# Altium PCB ui_layout-v1.2.PcbDoc
Units mil, origin at the board's own origin, x right, y up, seen from the top; angles counter-clockwise.
Board outline 3110.07 x 2131 mil, 4 copper layers (L1_Signal, L2_GND, L3_PWR, L4_Signal), stack 61.811 mil thick; 61 components, 69 nets, 248 pads, 77 vias.
Unrouted connection lines stored in the file: 65.
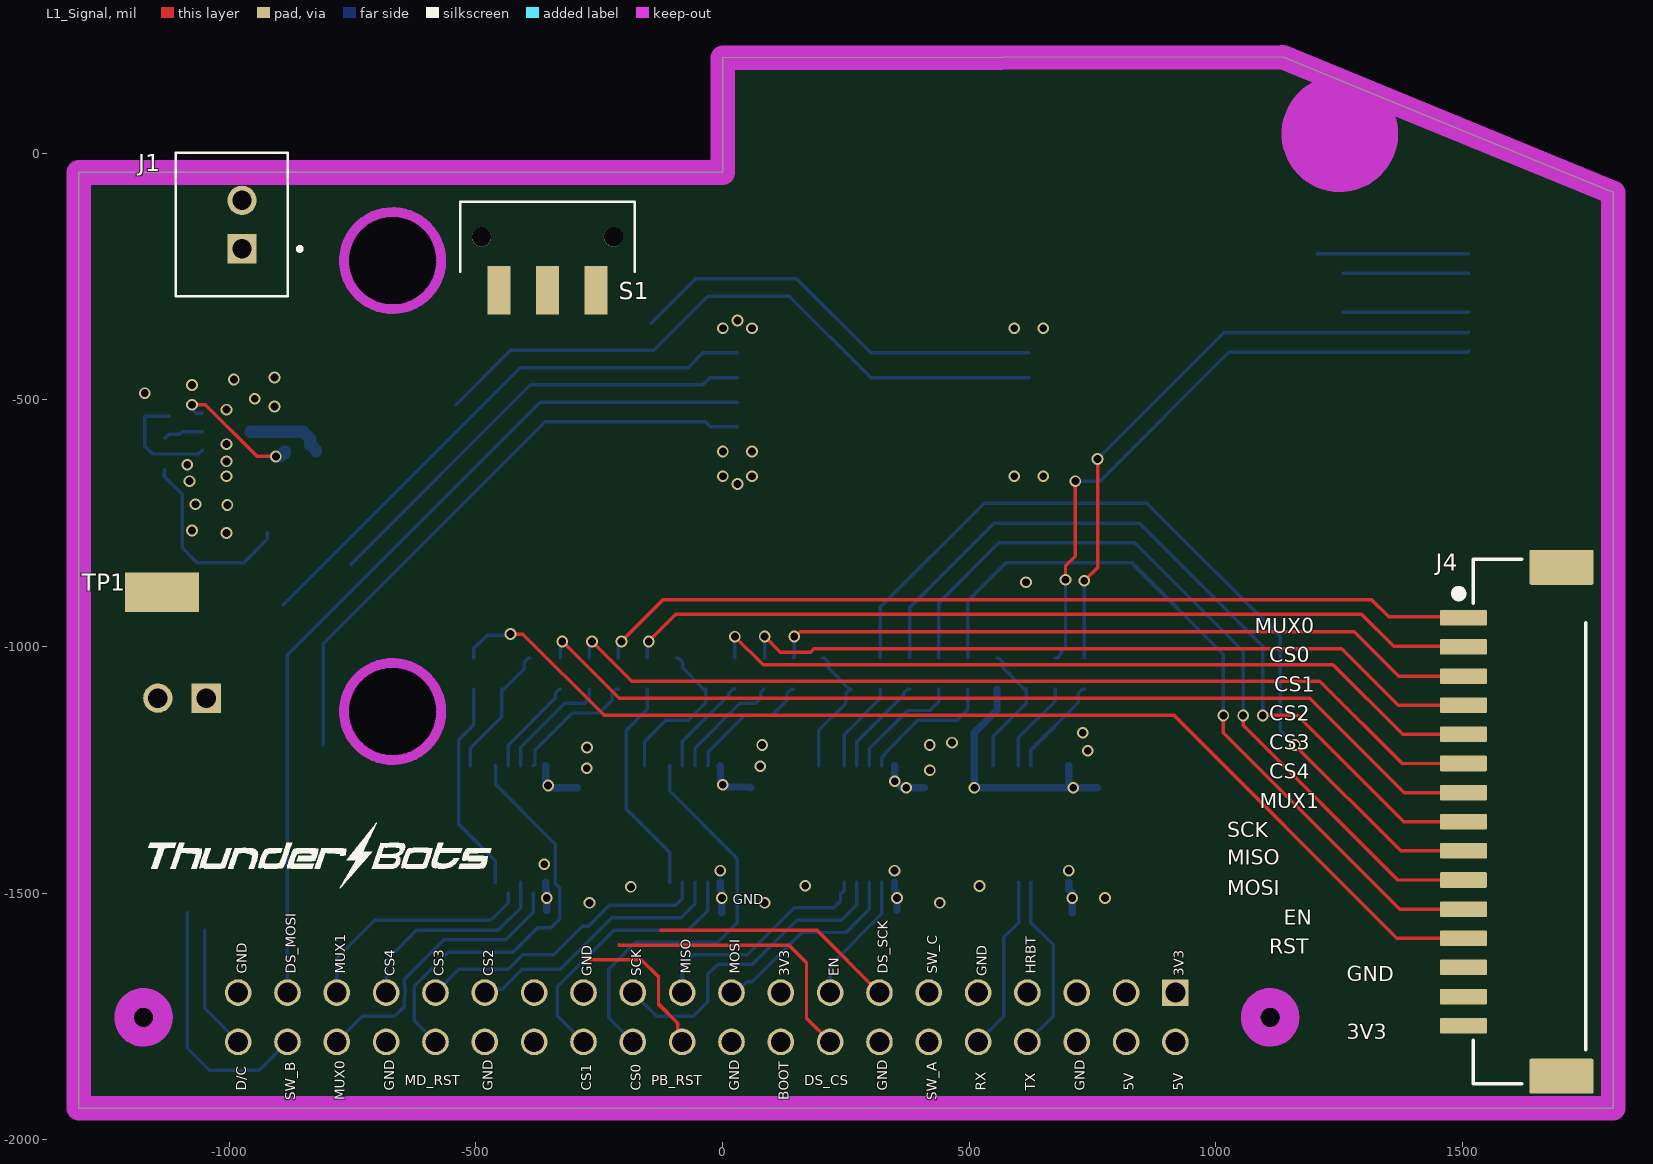
[diagram p0: L1_Signal view]
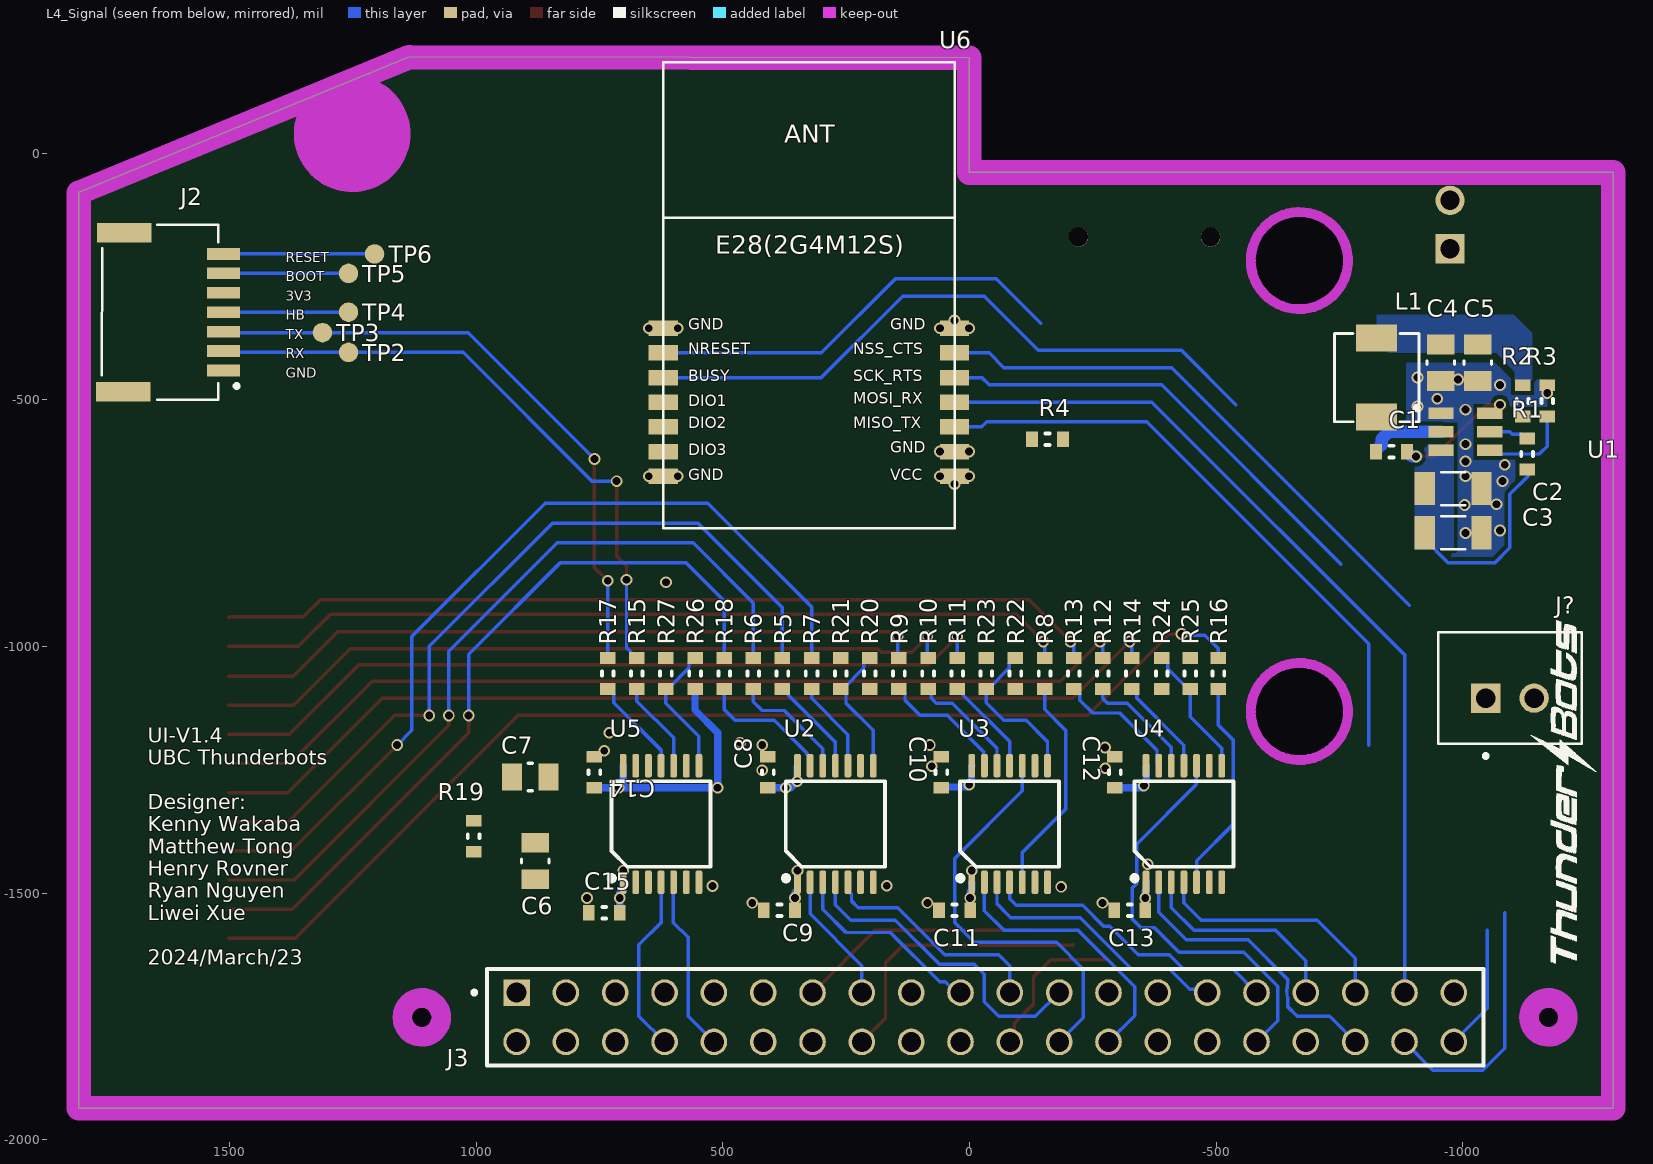
[diagram p1: L4_Signal view, seen from below]
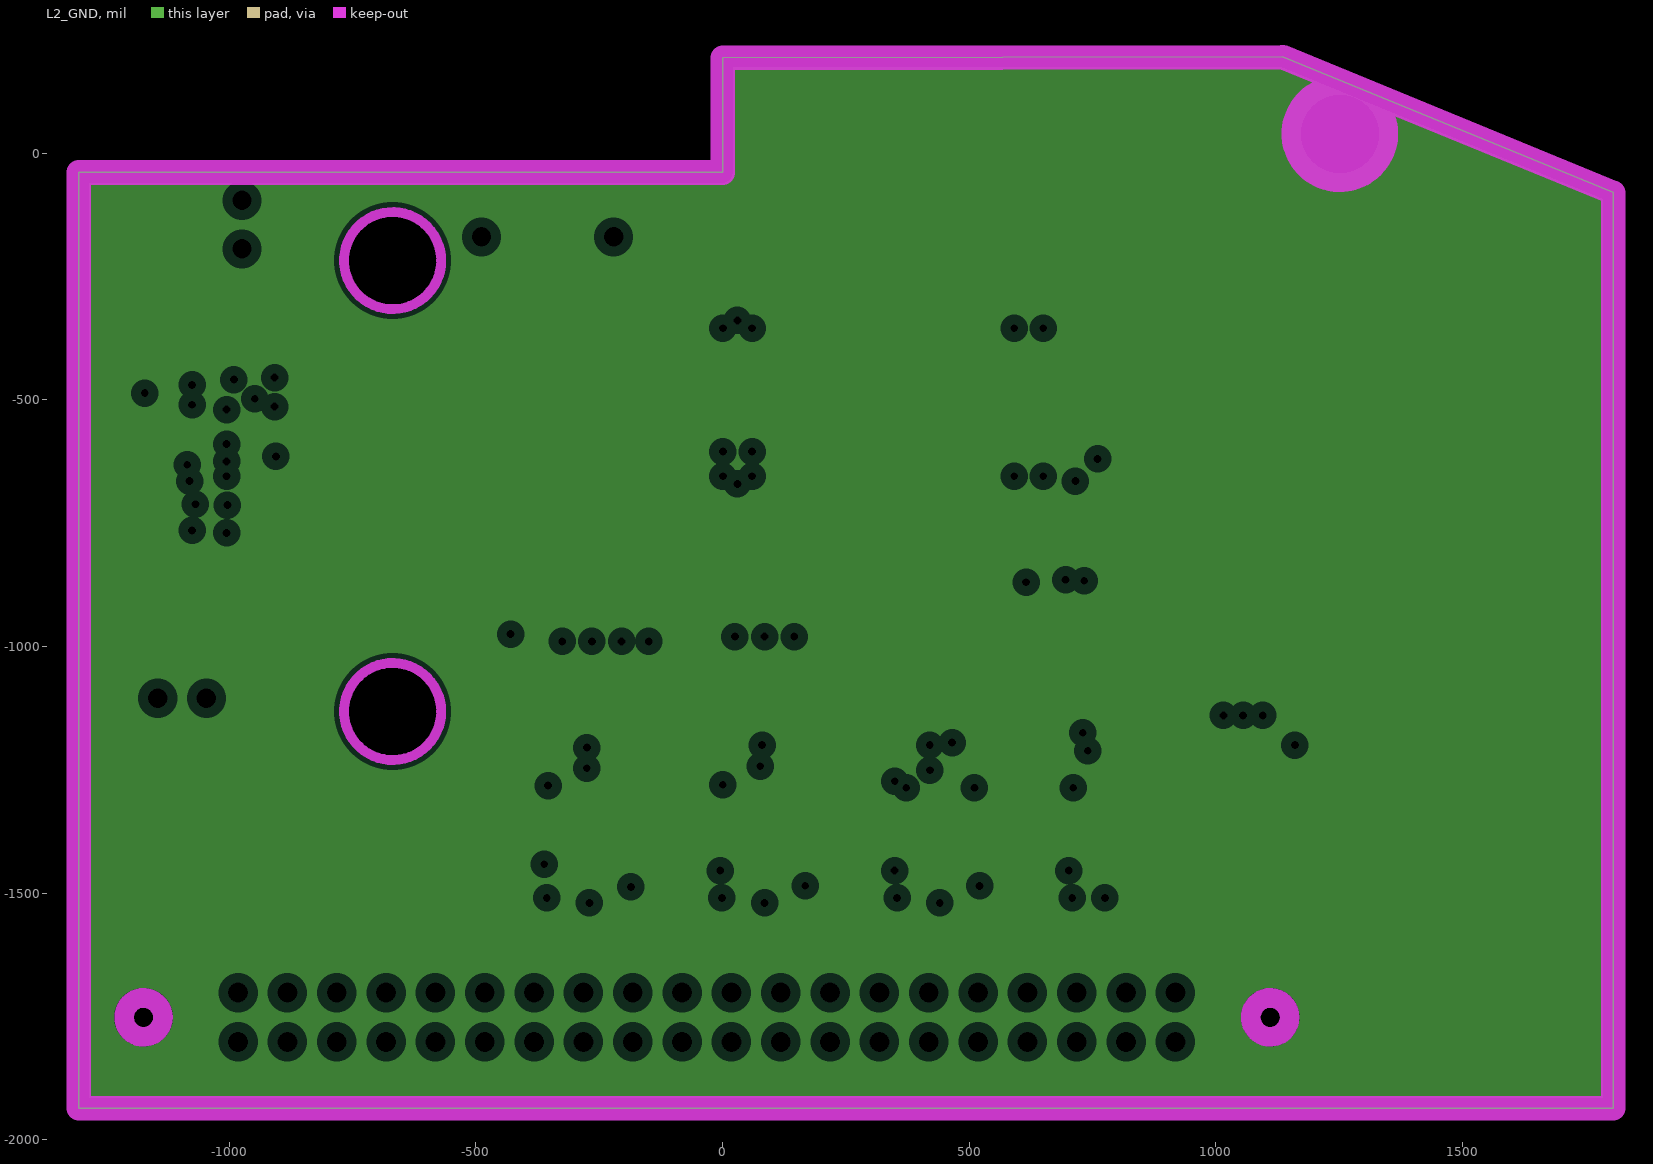
[diagram p2: L2_GND, clearances drawn from the general rule]
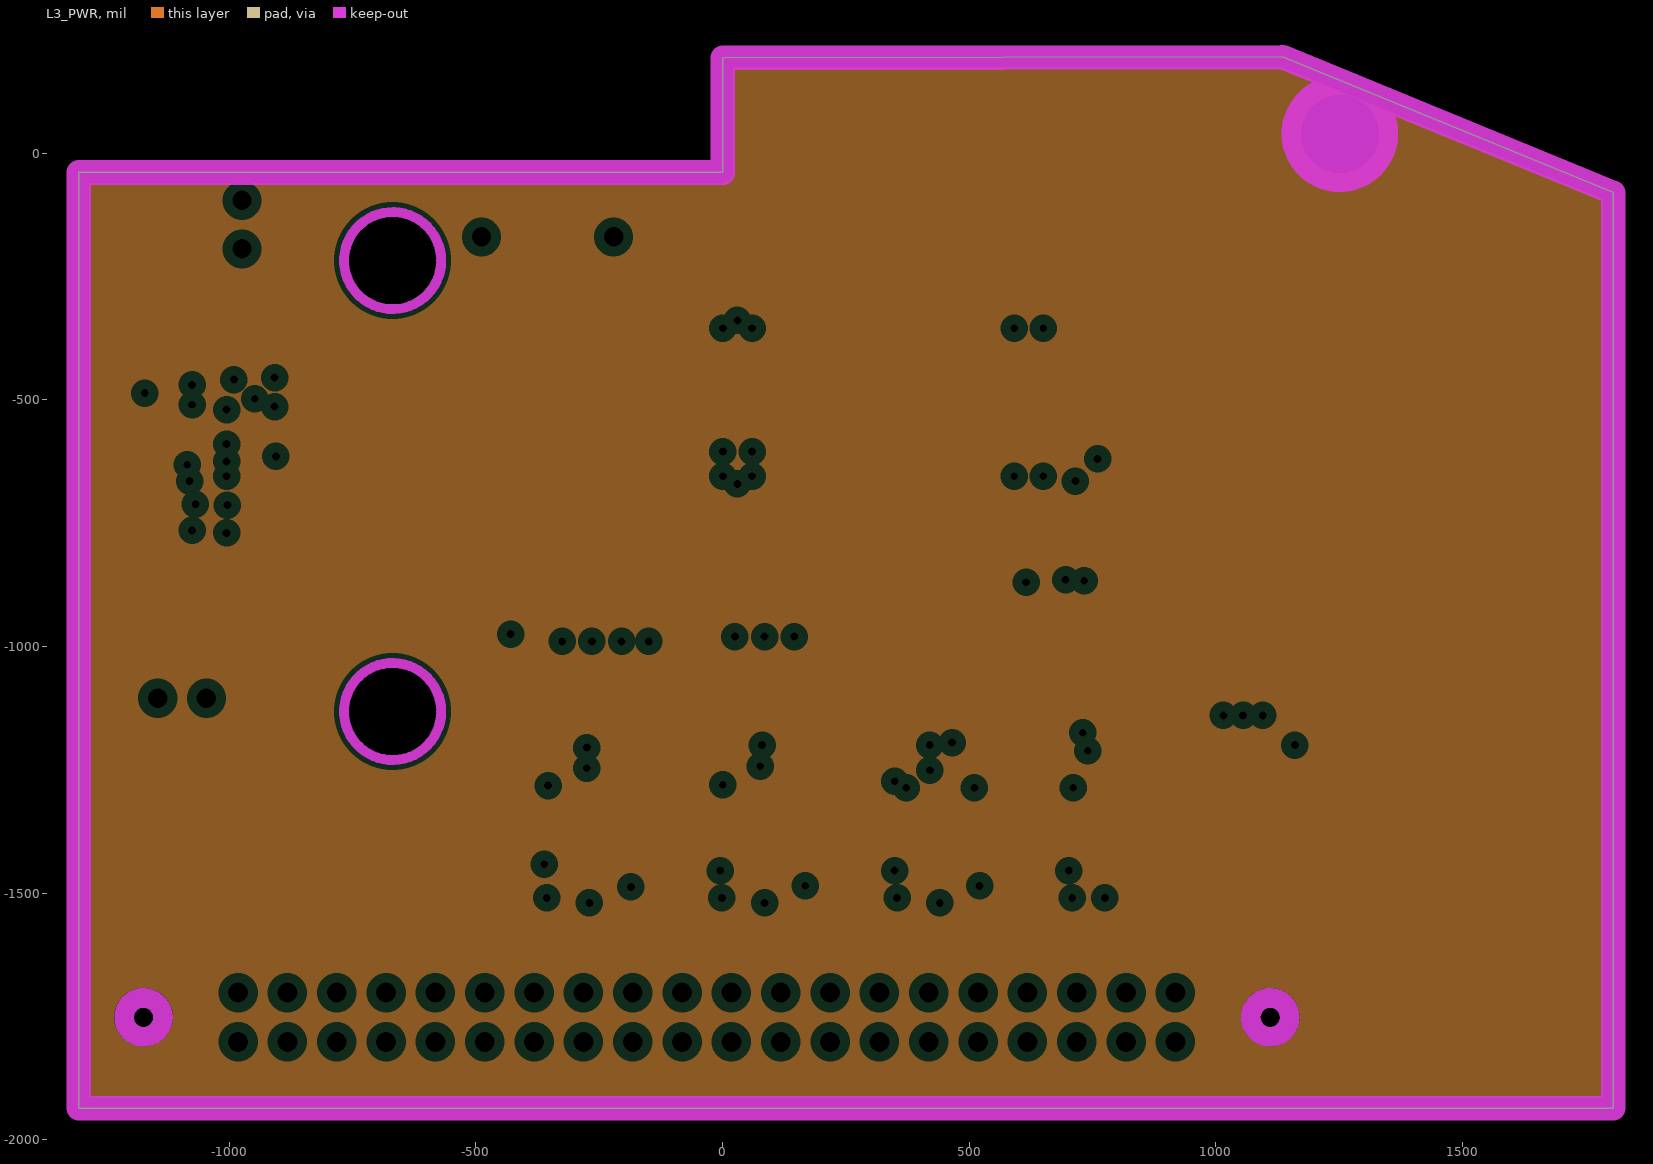
[diagram p3: L3_PWR, clearances drawn from the general rule]
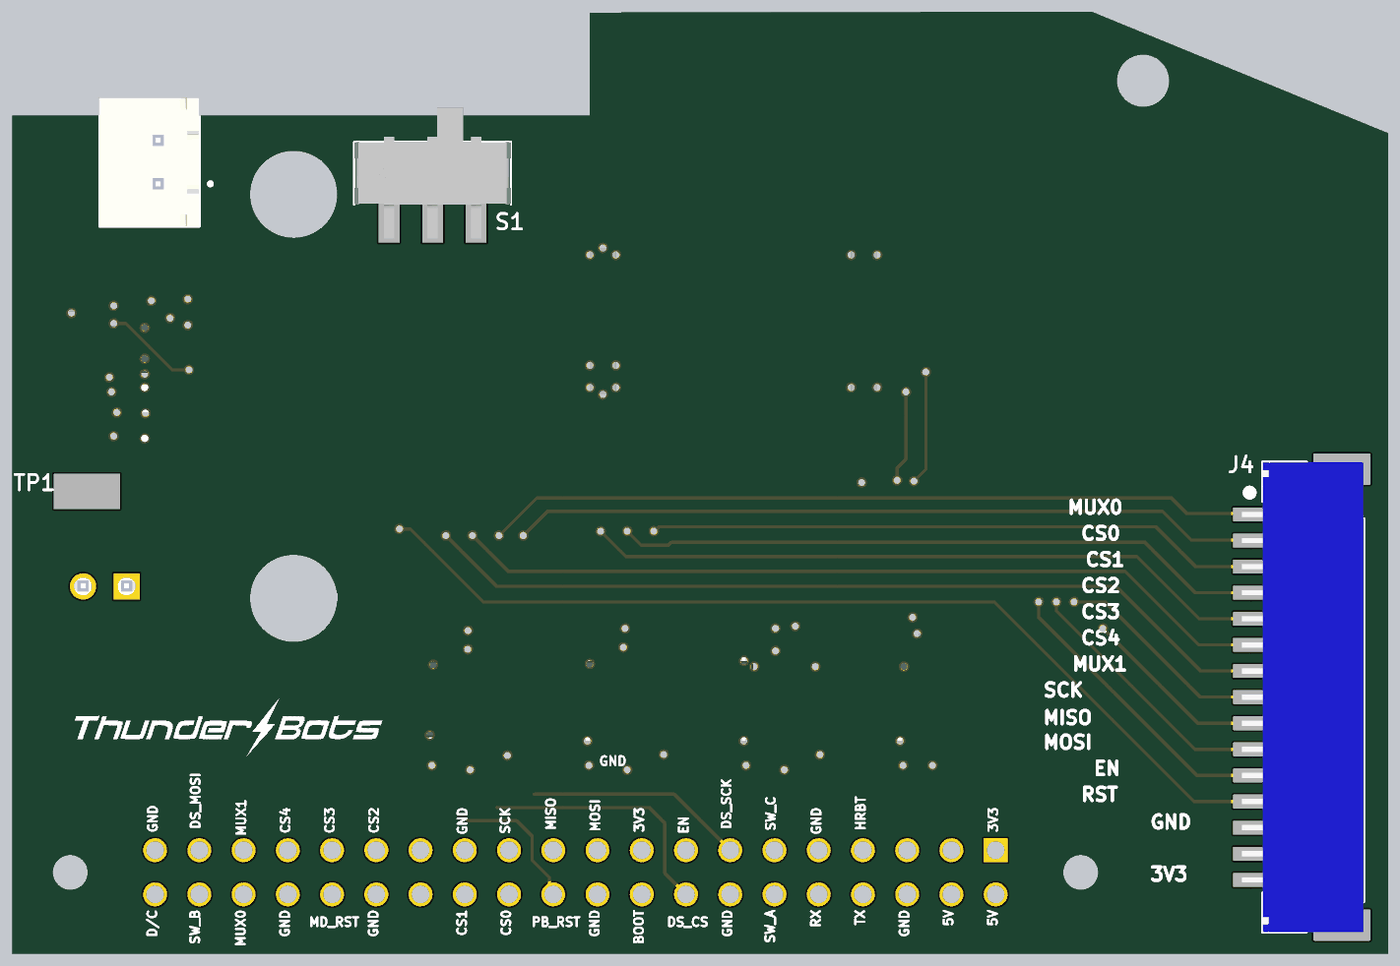
[diagram p4: 3D render of the assembled board from above, using the file's embedded part models]

## Layer stack, top to bottom
Top Mask: solder mask 0.591, Solder Resist, Dk 3.8
L1_Signal: signal copper 1.378
Dielectric 1: prepreg 3.937, 2313, Dk 4.05
L2_GND: plane copper 0.689
Core: core 49.803, FR-4, Dk 4.5
L3_PWR: plane copper 0.689
Dielectric 2: prepreg 3.937, 2313, Dk 4.05
L4_Signal: signal copper 1.378
Bottom Mask: solder mask 0.591, Solder Resist, Dk 3.8

## Board outline
-1305,-1936 1805,-1936 1805,-1934 1805,-80 1805.07,-79.82 1135,195 0,193.14 0,-39.37 -1305,-39.37

## Design rules (kind name [scope] priority, off if disabled: settings)
BoardOutlineClearance [All] p1: gap=7.87 ignorepadtopadclearanceinfootprint=FALSE except(15.75: Arc-SplitBarrior Arc-SplitContinuation Track-SplitBarrior Track-SplitContinuation SMDPad-SplitBarrior SMDPad-SplitContinuation THPad-SplitBarrior THPad-SplitContinuation Via-SplitBarrior Via-SplitContinuation Fill-SplitBarrior Fill-SplitContinuation Poly-SplitBarrior Poly-SplitContinuation Region-SplitBarrior Region-SplitContinuation Text-SplitBarrior Text-SplitContinuation)
Clearance "JETSON_5V Polygon Clearance" [(InNet('JETSON_5V')) AND InPolygon] p1: gap=15 ignorepadtopadclearanceinfootprint=FALSE
Clearance "POWER_5V Polygon Clearance" [(InNet('POWER_5V')) AND InPolygon] p2: gap=20 ignorepadtopadclearanceinfootprint=TRUE
Clearance [All] p3: gap=8 ignorepadtopadclearanceinfootprint=FALSE
HoleSize [All] p1: absolutevalues=TRUE maxlimit=248.03 minlimit=7.87 maxpercent=80.000 minpercent=20.000
MinimumAnnularRing [All] p1: minimumring=3
MinimumSolderMaskSliver [All] p1: minsoldermaskwidth=3.94
PlaneClearance [All] p1: clearance=20
PlaneConnect [All] p1: planeconnectstyle=Relief reliefexpansion=20 reliefentries=4 reliefconductorwidth=10 reliefairgap=10
PolygonConnect PolygonConnect_12V_Power [All] p1: connectstyle=Direct reliefconductorwidth=10 reliefentries=4 polygonreliefangle="90 Angle" airgapwidth=10
PolygonConnect PolygonConnect_3V3power [InNet('+3.3V')] p2: connectstyle=Direct reliefconductorwidth=10 reliefentries=4 polygonreliefangle="90 Angle" airgapwidth=10
PolygonConnect PolygonConnect_1 [All] p3: connectstyle=Relief reliefconductorwidth=10 reliefentries=4 polygonreliefangle="90 Angle" airgapwidth=10
PolygonConnect PolygonConnect_Vias [IsVia] p4: connectstyle=Direct reliefconductorwidth=10 reliefentries=4 polygonreliefangle="90 Angle" airgapwidth=10
PolygonConnect PolygonConnect_NoRelief [InPadClass('NoRelief')] p5: connectstyle=Direct reliefconductorwidth=20 reliefentries=4 polygonreliefangle="90 Angle" airgapwidth=10
PolygonConnect PolygonConnect_Ground [InNet('GND')] p6: connectstyle=Direct reliefconductorwidth=10 reliefentries=4 polygonreliefangle="90 Angle" airgapwidth=10
RoutingCorners [All] p1: cornerstyle=Round minsetback=100 maxsetback=100
RoutingVias [All] p1: holewidth=8 width=18 viastyle="Through Hole" minholewidth=8 minwidth=18 maxholewidth=39.37 maxwidth=78.74
SilkToSilkClearance [All] p1: silktosilkclearance=3.94
SilkToSolderMaskClearance [IsPad] p1: minsilkscreentomaskgap=3.94 clearancetoexposedcopper=TRUE
SolderMaskExpansion SolderMaskExpansion_Via [IsVia] p1: expansion=4 istentingtop=TRUE
SolderMaskExpansion [All] p2: expansion=4 istentingtop=FALSE
Width [All] p1: maxlimit=100 minlimit=4 preferedwidth=7
23 further rules are at their usual default settings.

## Classes and differential pairs
component class U_radio: U6
component class U_lowpass-filters: R5 R6 R7 R8 R9 R10 R11 R12 R13 R14 R15 R16 R17 R18
component class ui-pcb: ? TP1
component class U_buffers: C8 C9 C10 C11 C12 C13 C14 C15 R20 R21 R22 R23 R24 R25 R26 R27 U2 U3 U4 U5
component class U_jetson-nano: C6 C7 J3 R19
component class U_power: C1 C2 C3 C4 C5 J1 J2 J? L1 R1 R2 R3 R4 S1 TP2 TP3 TP4 TP5 TP6 U1
component class U_motor-driver: J4

## Components (designator, comment, footprint, x,y, rotation, side; value= is the part's Value field where it differs from the comment)
C1 "0.10uF" 0603 -855.67,-605 r180 bottom
C2 "10uF" 1206 -980.67,-680 r0 bottom
C3 "10uF" 1206 -980.67,-770 r0 bottom
C4 "22uF" 0805 -955.67,-425 r90 bottom
C5 "22uF" 0805 -1030.67,-425 r90 bottom
C6 "0.10uF 25V" 0805 880,-1435 r270 bottom value=0.1uF
C7 "0.10uF 25V" 0805 890,-1265 r0 bottom value=0.1uF
C8 "0.10uF" 0603 408.33,-1255 r90 bottom
C9 "0.10uF" 0603 385,-1535 r0 bottom
C10 "0.10uF" 0603 56.67,-1255 r90 bottom
C11 "0.10uF" 0603 30,-1535 r0 bottom
C12 "0.10uF" 0603 -295,-1255 r90 bottom
C13 "0.10uF" 0603 -325,-1535 r0 bottom
C14 "0.10uF" 0603 760,-1255 r90 bottom
C15 "0.10uF" 0603 740,-1540 r0 bottom
J1 "CN HDR 2POS JST XH" JST_B2B-XH-A(LF)(SN) -995,-145 r90 top
J2 "SM07B-NSHSS-TB (LF)(SN)" JST_SM07B-NSHSS-TB_(LF)(SN) 1512.24,-440.69 r90 bottom locked
J3 "CN HDR 40POS" "CN HDR 40POS 0.1 TH" -32.17,-1751.77 r0 bottom
J4 "BM15B-ZESS-TBT(LF)(SN)" "JST ZE SMT 15POS" 1610,-1385 r90 top locked
J? "CN HDR 2POS JST XH" JST_B2B-XH-A(LF)(SN) -1095.79,-1084.33 r180 bottom
L1 "2.2uH" L-SMD-0420 -825.67,-455 r270 bottom
R1 "10k" 0603 -1130.67,-610 r270 bottom
R2 "33k" 0603 -1121.42,-502.36 r270 bottom
R3 "10k" 0603 -1171.42,-502.36 r90 bottom
R4 "0" 0603 -158.5,-580 r180 bottom
R5 "JUMPER" 0603 378.9,-1055 r270 bottom value=0
R6 "JUMPER" 0603 437.95,-1055 r270 bottom value=0
R7 "JUMPER" 0603 319.86,-1055 r270 bottom value=0
R8 "JUMPER" 0603 -152.53,-1055 r270 bottom value=0
R9 "JUMPER" 0603 142.71,-1055 r270 bottom value=0
R10 "JUMPER" 0603 83.66,-1055 r270 bottom value=0
R11 "JUMPER" 0603 24.62,-1055 r270 bottom value=0
R12 "JUMPER" 0603 -270.62,-1055 r270 bottom value=0
R13 "JUMPER" 0603 -211.57,-1055 r270 bottom value=0
R14 "JUMPER" 0603 -329.67,-1055 r270 bottom value=0
R15 "JUMPER" 0603 674.14,-1055 r270 bottom value=0
R16 "JUMPER" 0603 -505,-1055 r270 bottom value=0
R17 "JUMPER" 0603 733.19,-1055 r270 bottom value=0
R18 "JUMPER" 0603 497,-1055 r270 bottom value=0
R19 "0" 0603 1005,-1385 r90 bottom
R20 "JUMPER" 0603 201.76,-1055 r90 bottom value=0
R21 "JUMPER" 0603 260.81,-1055 r90 bottom value=0
R22 "JUMPER" 0603 -93.48,-1055 r90 bottom value=0
R23 "JUMPER" 0603 -34.43,-1055 r90 bottom value=0
R24 "JUMPER" 0603 -390,-1055 r90 bottom value=0
R25 "JUMPER" 0603 -447.76,-1055 r90 bottom value=0
R26 "JUMPER" 0603 556.05,-1055 r90 bottom value=0
R27 "JUMPER" 0603 615.09,-1055 r90 bottom value=0
S1 "SW SLIDE SMALL" "SW SLIDE SMALL" -355,-170 r180 top
TP1 "Test Point - 5019" TP380X203 -1136.22,-890 r180 top
TP2 "Testpoint" TP_1mm 1258.47,-404 r90 bottom
TP3 "Testpoint" TP_1mm 1311.33,-364 r90 bottom
TP4 "Testpoint" TP_1mm 1258.47,-322.58 r90 bottom
TP5 "Testpoint" TP_1mm 1258.47,-243.84 r90 bottom
TP6 "Testpoint" TP_1mm 1205.61,-204.47 r90 bottom
U1 "TPS563201DDCR" TSOT-23-6 -1005.67,-565 r180 bottom
U2 "TXU0304PWR" 14-TSSOP 271.67,-1360 r90 bottom
U3 "TXU0304PWR" 14-TSSOP -81.67,-1360 r90 bottom
U4 "TXU0304PWR" 14-TSSOP -435,-1360 r90 bottom
U5 "TXU0304PWR" 14-TSSOP 625,-1360 r90 bottom
U6 "E28-2G4M12S" PE28(2G4M12S) 325.28,-505 r90 bottom

## Footprints (in the part's own frame and the unit in brackets; to place one, negate y for a bottom-side part, rotate by r counter-clockwise, add the part's x,y. Pads: shape width x height; smd on the part's side, far side on the other; paste and mask are expansions set on the pad)
14-TSSOP [mm]
  rrect50% 1.2x0.35 smd mask+0.07: 1(-3,1.95) 2(-3,1.3) 3(-3,0.65) 4(-3,0) 5(-3,-0.65) 6(-3,-1.3) 7(-3,-1.95) 8(3,-1.95) 9(3,-1.3) 10(3,-0.65) 11(3,0) 12(3,0.65) 13(3,1.3) 14(3,1.95)
  silkscreen extent -2.8,-2.55 2.2,2.55, body extent -3.2,-2.5 3.2,2.5, height 1.13
0603 [mm] "Chip Resistor, 2-Leads, Body 1.60x0.80mm, IPC High Density"
  rect 0.6x0.8 smd mask+0.1: 1(-0.8,0) 2(0.8,0)
  silkscreen extent -0.1,-0.3 0.1,0.3, body extent -0.8,-0.4 0.8,0.4, height 0.6
0805 [mil]
  rect 40x55 smd: 1(-37,0) 2(37,0)
  silkscreen extent -4,-28 4,28, body extent -47,-28 47,28, height 24
1206 [mm]
  rect 1.05x1.72 smd: 1(-1.46,0) 2(1.46,0)
  silkscreen extent -0.62,-0.85 0.62,0.85, body extent -1.6,-0.8 1.6,0.8, height 1.61
"CN HDR 40POS 0.1 TH" [mm] "40 Position Header Connector 0.100\" (2.54mm) Through Hole"
  rect 1.37x1.37 hole 1.02: 01(24.13,-1.27)
  round 1.37 hole 1.02: 02(24.13,1.27) 03(21.59,-1.27) 04(21.59,1.27) 05(19.05,-1.27) 06(19.05,1.27) 07(16.51,-1.27) 08(16.51,1.27) 09(13.97,-1.27) 10(13.97,1.27) 11(11.43,-1.27) 12(11.43,1.27) 13(8.89,-1.27) 14(8.89,1.27) 15(6.35,-1.27) 16(6.35,1.27) 17(3.81,-1.27) 18(3.81,1.27) 19(1.27,-1.27) 20(1.27,1.27) 21(-1.27,-1.27) 22(-1.27,1.27) 23(-3.81,-1.27) 24(-3.81,1.27) 25(-6.35,-1.27) 26(-6.35,1.27) 27(-8.89,-1.27) 28(-8.89,1.27) 29(-11.43,-1.27) 30(-11.43,1.27) 31(-13.97,-1.27) 32(-13.97,1.27) 33(-16.51,-1.27) 34(-16.51,1.27) 35(-19.05,-1.27) 36(-19.05,1.27) 37(-21.59,-1.27) 38(-21.59,1.27) 39(-24.13,-1.27) 40(-24.13,1.27)
  silkscreen extent -25.66,-2.47 26.4,2.47
"JST ZE SMT 15POS" [mm] "15 POS HDR JST ZE"
  rrect10% 1.8x3.3 smd: 0(-12.35,-2.3) 0(13.85,-2.3)
  rrect10% 0.8x2.4 smd: 1(11.25,2.75) 2(9.75,2.75) 3(8.25,2.75) 4(6.75,2.75) 5(5.25,2.75) 6(3.75,2.75) 7(2.25,2.75) 8(0.75,2.75) 9(-0.75,2.75) 10(-2.25,2.75) 11(-3.75,2.75) 12(-5.25,2.75) 13(-6.75,2.75) 14(-8.25,2.75) 15(-9.75,2.75)
  silkscreen extent -12.75,-3.55 14.26,3, body extent -12.75,-3.55 14.25,3.45, height 7.6
JST_B2B-XH-A(LF)(SN) [mm]
  rect 1.508x1.508 hole 1: 1(-1.25,-0.525)
  round 1.508 hole 1: 2(1.25,-0.525)
  silkscreen extent -3.7,-3.6 3.7,2.88, body extent -3.7,-2.85 3.7,2.9, height 7.1
JST_SM07B-NSHSS-TB_(LF)(SN) [mm]
  rect 0.6x1.7 smd: 1(0,0) 2(1,0) 3(2,0) 4(3,0) 5(4,0) 6(5,0) 7(6,0)
  rect 1x2.8 smd: P1(-1.1,5.15) P2(7.1,5.1)
  silkscreen extent -1.5,-0.78 7.5,6.25, body extent -1.5,-0.5 7.5,6.3, height 4.51
L-SMD-0420 [mm]
  rect 1.4x2.12 smd: 1(2.028,0) 2(-2.028,0)
  silkscreen extent -2.28,-2.18 2.28,2.18
PE28(2G4M12S) [mm] "24mm*15mm*2.85mm-S"
  rect 0.8x1.5 smd: 1(-3.81,-7.5) 2(-2.54,-7.5) 3(-1.27,-7.5) 4(0,-7.5) 5(1.27,-7.5) 6(2.54,-7.5) 7(3.81,-7.5) 8(3.81,7.5) 9(2.54,7.5) 10(1.27,7.5) 11(0,7.5) 12(-1.27,7.5) 13(-2.54,7.5) 14(-3.81,7.5)
  silkscreen extent -6.5,-7.5 17.5,7.5
"SW SLIDE SMALL" [mm]
  rect 1.2x2.5 smd: 1(-2.5,2.75) 2(0,2.75) 3(2.5,2.75)
  round 1 hole 1 unplated: ""(-3.4,0) ""(3.4,0)
  silkscreen extent -4.5,-1.8 4.5,1.8, body extent -4.5,-3.75 4.5,3.75, height 3.51
TP380X203 [mm]
  rect 3.8x2.03 smd: 1(0,0)
TP_1mm [mm]
  round 1 smd paste-2: 1(0,0)
TSOT-23-6 [mm] "SOT-23-6 Thin"
  rect 1.3x0.6 smd: 1(-1.255,0.95) 2(-1.255,0) 3(-1.255,-0.95) 4(1.255,-0.95) 5(1.255,0) 6(1.255,0.95)
  silkscreen extent -2.6,1.15 -2.4,1.35, body extent -1.4,-1.45 1.4,1.45, height 0.97

## Part data
C1: library part "CAP 0.1uF 50V", "Default Symbol for Capacitors", Rating=50V, Temperature Coefficient=X7R, Tolerance=10%, Part Number="CAP 0.1uF 50V"
C2 C3: library part "CAP 10uF 25V", "Default Symbol for Capacitors", Rating=25V, Temperature Coefficient=X5R, Tolerance=10%, Part Number="CAP 10uF 25V"
C4 C5: library part "CAP 22uF 10V", "Default Symbol for Capacitors", Rating=10V, Temperature Coefficient=X5R, Tolerance=20%, Part Number="CAP 22uF 10V"
C6 C7: library part "CAP 0.10uF 25V", "CAP CER 0.10UF 25V X7R 0805", Operating Temperature="-55°C ~ 125°C", Rating=25V, Temperature Coefficient=X7R, Tolerance=10%, Part Number="CAP 0.10uF 25V"
C8 C9 C10 C11 C12 C13 C14 C15: library part "CAP 0.10uF 16V", "CAP CER 0.10UF 16V X5R 0603", Operating Temperature="-55°C ~ 85°C", Package=0603/0805, Rating=16V, Temperature Coefficient=X5R, Tolerance=10%, Part Number="CAP 0.10uF 16V"
J1 J?: "Connector Header Through Hole 2 position 0.098 _2.50mm_ / JST XH", Package=None, MF="JST Sales", MP=B2B-XH-A_LF__SN_, Part Number="CN HDR 2POS JST XH", Pin Count=2, Price=None, SnapEDA_Link=https://www.snapeda.com/parts/B2B-XH-A%28LF%29%28SN%29/JST%20Sales%20America%20Inc./view-part/492310/?ref=snap
J2: library part "CN 7POS JST NSH SMT RA", "Connector Header Surface Mount, Right Angle 7 position 0.039\" (1.00mm)", Package=None, Supplier Part Number 1=455-2771-1-ND, Availability=Unavailable, Check_prices=https://www.snapeda.com/parts/SM12B-NSHSS-TB%20(LF)(SN)/JST%20Sales%20America%20Inc./view-part/5255521/?ref=eda, MF="JST Sales America Inc.", MP="SM12B-NSHSS-TB (LF)(SN)", Part Number="CN 7POS JST NSH SMT RA", Pin Count=7, Price=None, SnapEDA_Link=https://www.snapeda.com/parts/SM12B-NSHSS-TB%20(LF)(SN)/JST%20Sales%20America%20Inc./view-part/5255521/?ref=snap, Supplier 1=Digi-Key, Supplier 2=Digi-Key, Supplier 3=Digi-Key, Supplier 4=Digi-Key, Supplier Part Number 2=455-2771-1-ND, Supplier Part Number 3=455-2771-6-ND, Supplier Part Number 4=455-2771-2-ND, Supplier URL 1=https://www.digikey.ca/en/products/detail/jst-sales-america-inc/SM07B-NSHSS-TB-LF-SN/3313637
J3: "40 Position Header Connector", Supplier Part Number 1=S6104-ND, Part Number="CN HDR 40POS", Pin Count=40, Supplier 1=Digi-Key, Supplier URL 1=https://www.digikey.ca/en/products/detail/sullins-connector-solutions/PPTC202LFBN-RC/807240?s=N4IgTCBcDaIMoDYCMAGALAWgHIBEQF0BfIA
J4: library part "CN 15POS JST ZE SMT", "CONN HEADER VERT SMD 15POS ZE", Supplier Part Number 1=455-4211-1-ND, Manufacturer Part Number 1=BM15B-ZESS-TBT(LF)(SN), Part Number="CN 15POS JST ZE SMT", Pin Count=15, Supplier 1=Digi-Key, Supplier URL 1=https://www.digikey.ca/en/products/detail/jst-sales-america-inc/BM15B-ZESS-TBT-LF-SN/1886999?s=N4IgTCBcDaIEIFkCMBWOBaAWgUQMq-QBU5CAKAGQDEBKU3AOWpAF0BfIA
L1: library part "IND 2.2uH 3A 0420", "Standard inductor symbol", Part Number="IND 2.2uH 3A 0420"
R1 R3: library part "RES 10k 1/8W - 1%", "Default Resistor Symbol", Manufacturer Part Number 1=ERJ-H3GJ103V, Manufacturer Part Number 2=RMCF0805JT10K0, Package=0805, Power (Watts)=0.125W, Supplier Part Number 1=10-ERJ-H3GJ103VCT-ND, Tolerance=5%, Part Number="RES 10k 1/8W - 1%", Supplier 1=Digi-Key, Supplier 2=Digi-Key, Supplier Part Number 2=RMCF0805JT10K0CT-ND, Supplier URL 1=https://www.digikey.ca/en/products/detail/panasonic-electronic-components/ERJ-H3GJ103V/13877876?s=N4IgTCBcDaIIwAYC0BRASgKSQCQMwHENFcA1AYQBUkA5AERAF0BfIA, Supplier URL 2=https://www.digikey.ca/en/products/detail/stackpole-electronics-inc/RMCF0805JT10K0/1757762?s=N4IgTCBcDaIEoFkDCAxADADjQVgFIBUBGNAaTSXxAF0BfIA, Tolerance 2=5%
R2: library part "RES 33k 1/8W", "Default Resistor Symbol", Package=0805, Power (Watts)=0.125W, Tolerance=5%, Part Number="RES 33k 1/8W"
R4 R19: library part "RES 0 JUMPER 0603", "Default Resistor Symbol", Package=0805, Power (Watts)=0.125W, Tolerance=N/A, Part Number="RES 0 JUMPER 0603"
R5 R6 R7 R8 R9 R10 R11 R12 R13 R14 R15 R16 R17 R18 R20 R21 R22 R23 R24 R25 R26 R27: library part "RES 0 JUMPER", "RES SMD 0 OHM JUMPER GENERIC 0603", Manufacturer Part Number 1=RK73Z1JTTD, Package=0805, Supplier Part Number 1=2019-RK73Z1JTTDCT-ND, Tolerance=N/A, Part Number="RES 0 JUMPER", Supplier 1=Digi-Key, Supplier URL 1=https://www.digikey.ca/en/products/detail/koa-speer-electronics-inc/RK73Z1JTTD/9845478
S1: "Slide Switch SPDT Surface Mount, Right Angle", Manufacturer Part Number 1="JS102011SAQN SPDT", Package=None, Availability=Unavailable, MF=C&K, MP=JS102011SAQN, Part Number="SW SLIDE SMALL", Price=None, SnapEDA_Link=https://www.snapeda.com/parts/JS102011SAQN/C%26K/view-part/214325/?ref=snap, Supplier 1=Digi-key, Supplier Part Number 1="JS102011SAQN SPDT", Supplier URL 1=https://www.digikey.ca/en/products/detail/c-k/JS102011SAQN/1640095
TP1: "PC Test Point, Miniature Phosphor Bronze, Silver Plating Surface Mount Mounting Type", Package="2010 Keystone", MF="Keystone Electronics", MP=5019, Part Number="Test Point - 5019"
TP2 TP3 TP4 TP5 TP6: library part TP_1MM, Part Number=TP_1MM
U1: "17 V Input, 3A Synchronous Step-Down Regulator in SOT-23 with Advanced Eco-mode™", Part Number=TPS563201DDCR
U2 U3 U4 U5: library part TXU0304, "4-Bit Fixed Direction Voltage-Level Translator with Schmitt-Trigger Inputs  and 3-State Outputs", Mfr_Name="Texas Instruments", Supplier Part Number 1=296-TXU0304PWRTR-ND, Copyright="Copyright (C) 2022 Ultra Librarian. All rights reserved.", Digi-Key_Part_Number_1=296-TXU0304PWRTR-ND, Digi-Key_Part_Number_2=296-TXU0304PWRCT-ND, Digi-Key_Part_Number_3=296-TXU0304PWRDKR-ND, Manufacturer_Part_Number=TXU0304PWR, Part Number=TXU0304, RefDes=RefDes, Supplier 1=Digi-Key, Supplier URL 1=https://www.digikey.ca/en/products/detail/texas-instruments/TXU0304PWR/14641423, Type=DEV
U6: "2.4GHz LoRa modules", Part Number=E28-2G4M12S

## Free pads (board coordinates)
  round 60 hole 78.74 unplated: 1(-1174,-1752) 1(1110,-1752)
  round 60 hole 196.85 unplated: 1(-669,-1132) 1(-669,-218)
  oct 60x60 hole 118.11 unplated: 1(1251,39)

## Via types
v1: diameter 23.62, hole 15.75, L1_Signal to L4_Signal, tented both sides, 77 vias

## Nets (pads, with @x,y where several pads share a name; then routed paths per layer and width w, separated by ;. In a path a pad name is that pad's centre, name@x,y a point inside that pad or via, vN(x,y) a via of type N, cw(c..) or ccw(c..) an arc to the next point about the centre after c; other vN are vias at no path point)
3.3V_FB: R2.2 R3.1 U1.4 | length 236.4
  L4_Signal w7: R2.2 R3.1 -1171.42,-594.25 -1155.67,-610 -1062.68,-610 U1.4
3.3V_SW: C1.1 L1.1 U1.2 | length 156.8
  L4_Signal w25: U1.2 -850.32,-565 -835.67,-579.64 -835.67,-590.94 -824.18,-602.44 C1.1
+3.3V: C4.2 C5.2 L1.2 R2.1 R4.1 U6.1
  other v1: 30,-670.75 0.47,-655 59.53,-655
+12V: C2.2 C3.2 J?.1 R1.2 U1.3 | length 398.3
  L4_Signal w7: R1.2 -1130.67,-652.56 -1133.43,-649.81 -1133.43,-653.74 -1095.67,-691.5 -1095.67,-800 -1065.67,-830 -970,-830 -923.19,-783.19 C3.2
BF_CS_CTRL_0: R8.2 U3.5 | length 445.6
  L4_Signal w7: R8.2 -152.53,-1127.53 -195,-1170 -195,-1330 -107.26,-1417.74 U3.5
BF_CS_CTRL_1: R9.2 U3.13 | length 261.7
  L4_Signal w7: U3.13 -29.02,-1240.42 -29.02,-1214.02 45,-1140 100,-1140 130.46,-1109.54 130.46,-1094.81 138.78,-1086.5 R9.2
BF_CS_CTRL_2: R10.2 U3.12 | length 232
  L4_Signal w7: U3.12 -56.08,-1206.08 35,-1115 66.97,-1115 77.27,-1104.71 77.27,-1092.9 R10.2
BF_CS_CTRL_3: R11.2 U3.11 | length 201.7
  L4_Signal w7: U3.11 -81.67,-1192.78 12.37,-1098.74 12.37,-1094.81 20.68,-1086.5 R11.2
BF_CS_CTRL_4: R12.2 U4.12 | length 236.3
  L4_Signal w7: U4.12 -409.41,-1204.41 -320,-1115 -280,-1115 -270.62,-1105.62 R12.2
BF_CTRL_EN: R18.2 U2.13 | length 274.1
  L4_Signal w7: U2.13 322.85,-1225.16 330.05,-1217.96 330.05,-1215.52 395.57,-1150 475,-1150 497,-1128 R18.2
BF_MISO: R7.2 U2.10 | length 186
  L4_Signal w7: U2.10 246.08,-1178.92 319.86,-1105.14 R7.2
BF_MOSI: R6.2 U2.12 | length 240
  L4_Signal w7: U2.12 297.26,-1207.74 375,-1130 420,-1130 437.95,-1112.05 R6.2
BF_MUX_SEL_0: R13.2 U4.13 | length 261.3
  L4_Signal w7: U4.13 -380.43,-1238.5 -380.43,-1210.43 -305,-1135 -250,-1135 -223.82,-1108.82 -223.82,-1094.81 -215.51,-1086.5 R13.2
BF_MUX_SEL_1: R14.2 U4.11 | length 200
  L4_Signal w7: U4.11 -435,-1200 -339.71,-1104.71 -339.71,-1094.81 -331.4,-1086.5 R14.2
BF_RESET: R16.2 U4.5 | length 435.2
  L4_Signal w7: R16.2 -505,-1160 -535.39,-1190.39 -535.39,-1360 -460.59,-1434.8 U4.5
BF_RX: R15.2 U5.10 | length 186.3
  L4_Signal w7: U5.10 599.41,-1185.59 674.14,-1110.86 R15.2
BF_SCK: R5.2 U2.11 | length 202.1
  L4_Signal w7: U2.11 271.67,-1193.73 366.65,-1098.74 366.65,-1094.81 374.97,-1086.5 R5.2
BF_TX: R17.2 U5.11 | length 202.5
  L4_Signal w7: U5.11 625,-1210 720.94,-1114.06 720.94,-1094.81 729.25,-1086.5 R17.2
BOOT: J2.7 TP6.1 | length 306.6
  L4_Signal w7: TP6.1 J2.7
CS_CTRL_0: J4.2 R8.1 | length 1736.5
  L1_Signal w7: v1(-150,-990) -95,-935 1295,-935 1360,-1000 1500.59,-1000 J4.2
  L4_Signal w7: R8.1 -152.53,-992.53 v1(-150,-990)
CS_CTRL_1: J4.3 R9.1 | length 1442.7
  L1_Signal w7: v1(145,-980) 147.41,-980 157.41,-970 1280,-970 1370.2,-1060.2 J4.3
  L4_Signal w7: R9.1 145,-1021.22 v1(145,-980)
CS_CTRL_2: J4.4 R10.1 | length 1524
  L1_Signal w7: v1(85,-980) 116.69,-1011.69 178.31,-1011.69 185,-1005 1255,-1005 1369.25,-1119.25 J4.4
  L4_Signal w7: R10.1 85,-1022.17 v1(85,-980)
CS_CTRL_3: J4.5 R11.1 | length 1602.6
  L1_Signal w7: v1(24.81,-980.19) 81.88,-1037.26 1237.26,-1037.26 1378.31,-1178.31 J4.5
  L4_Signal w7: R11.1 24.62,-980.38 v1(24.81,-980.19) v1@25,-980
CS_CTRL_4: J4.6 R12.1 | length 1905
  L1_Signal w7: v1(-265,-990) -184.25,-1070.75 1210.75,-1070.75 1377.36,-1237.36 J4.6
  L4_Signal w7: R12.1 -270.62,-995.62 v1(-265,-990)
CTRL_EN: J4.11 R18.1 | length 1536.6
  L1_Signal w7: v1(1015,-1140) 1015,-1175 1372.64,-1532.64 J4.11
  L4_Signal w7: R18.1 497,-908 575,-830 828.82,-830 1015,-1016.18 v1(1015,-1140)
GND: C2.1 C3.1 C4.1 C5.1 J?.2 R3.2 U1.1 U6.2 U6.7 U6.8 U6.14
  other v1: -1005.67,-770 -1075.67,-765 -1003.97,-713.46 -1068.67,-711.64 -1080.67,-665 -1005.67,-655 591.02,-655 650.08,-655 -1085.47,-631.93 -1005.67,-625 0.47,-605 59.53,-605 -1005.67,-590 -1005.67,-520 -908.35,-513.87 -948.31,-498.07 -1171.42,-486.62 -1075.67,-470 -990.71,-459.01 -908.35,-455 0.47,-355 59.53,-355 591.02,-355 650.08,-355 30,-339.25
JETSON_3V3: C7.2 C8.1 C9.1 C10.1 C11.1 C12.1 C13.1 C14.1 C15.1 J2.5 J3.17 J4.14 J4.15 R4.2 R19.2 R20.1 R22.1 R24.1 R26.1 U2.1 U2.14 U3.1 U3.14 U4.1 U4.14 U5.1 U5.14 | length 1060.5
  L4_Signal w15: U4.1 -358.23,-1493.62 -356.5,-1495.35 C13.1 ; U4.14 -358.23,-1277.71 -349.44,-1286.5 C12.1 ; U3.1 -4.89,-1493.62 -1.5,-1497.02 C11.1@-1.5,-1540 ; U3.14 -4.28,-1242.5 -4.28,-1275.72 5,-1285 55.17,-1285 C10.1 ; U2.1 348.44,-1493.62 353.5,-1498.69 C9.1 ; U2.14 349.05,-1242.5 349.05,-1274.05 361.5,-1286.5 C8.1 ; R26.1 556.05,-1128.95 510.29,-1174.71 v1(510.29,-1286.5) v1(710.56,-1286.5) ; U5.1 701.77,-1493.62 708.5,-1500.35 C15.1 ; U5.14 701.77,-1277.71 v1(710.56,-1286.5) ; C14.1 v1(710.56,-1286.5)
  other v1: -356.5,-1510 -1.5,-1510 353.5,-1510 708.5,-1510 -4.89,-1454.49 348.44,-1454.49 701.77,-1454.49 372.06,-1286.5 -353.83,-1282.1 0.36,-1280.36 349.05,-1273.39
JETSON_5V: C6.2 J3.02 J3.04
JETSON_GND: C6.1 C7.1 C8.2 C9.2 C10.2 C11.2 C12.2 C13.2 C14.2 C15.2 J2.1 J3.06 J3.09 J3.14 J3.20 J3.25 J3.30 J3.34 J3.39 J4.13 R21.2 R23.2 R25.2 R27.2 TP1.1 U2.7 U3.7 U4.7 U5.7
  other v1: -270,-1520 85,-1520 440,-1520 76.35,-1242.93 740.31,-1211.69 -275,-1205 420,-1200 615,-870
LF_MISO_SRC: J4.9 R7.1 | length 1775.4
  L1_Signal w7: v1(1160,-1200) 1374.53,-1414.53 J4.9
  L4_Signal w7: R7.1 319.86,-920.14 530,-710 860,-710 1130,-980 1130,-1170 v1(1160,-1200)
LF_MOSI_DST: J4.10 R6.1 | length 1596.8
  L1_Signal w7: v1(1055,-1140) 1055,-1160 1368.58,-1473.58 J4.10
  L4_Signal w7: R6.1 437.95,-912.05 560,-790 835,-790 1055,-1010 v1(1055,-1140)
LF_MUX_SEL_0_DST: J4.1 R13.1 | length 1793.5
  L1_Signal w7: v1(-205,-990) -120,-905 1315,-905 1350,-940 1499.65,-940 J4.1
  L4_Signal w7: R13.1 -211.57,-996.57 v1(-205,-990)
LF_MUX_SEL_1_DST: J4.7 R14.1 | length 1989.1
  L1_Signal w7: v1(-325,-990) -210,-1105 1190,-1105 1381.42,-1296.42 J4.7
  L4_Signal w7: R14.1 -329.67,-994.67 v1(-325,-990)
LF_RST_DST: J4.12 R16.1 | length 2293.1
  L1_Signal w7: v1(-430,-975) -405,-975 -240,-1140 915,-1140 1366.69,-1591.69 J4.12
  L4_Signal w7: R16.1 -505,-1005 -477.31,-977.31 -432.31,-977.31 v1(-430,-975)
LF_RX_PWR: J2.2 R15.1 TP2.1 | length 1284.2
  L1_Signal w7: v1(695,-865) 695,-836.91 715,-816.91 v1(715,-665)
  L4_Signal w7: R15.1 678.08,-1023.5 686.39,-1015.19 686.39,-1011.26 695,-1002.64 v1(695,-865) ; v1(715,-665) 765,-665 1026,-404 TP2.1 1509.57,-404 J2.2
LF_SCK_DST: J4.8 R5.1 | length 1628.9
  L1_Signal w7: v1(1095,-1140) 1165,-1140 1380.47,-1355.47 J4.8
  L4_Signal w7: R5.1 378.9,-921.1 550,-750 845,-750 1095,-1000 v1(1095,-1140)
LF_TX_PWR: J2.3 R17.1 TP3.1 | length 1276.3
  L1_Signal w7: v1(733.19,-866.81) 760,-840 v1(760,-620)
  L4_Signal w7: R17.1 v1(733.19,-866.81) v1@735,-865 ; v1(760,-620) 1016,-364 TP3.1 1510.2,-364 J2.3
NetC1_2: C1.2 U1.6 | length 271
  L1_Signal w7: v1(-1075.67,-510) -1048.67,-510 -943.67,-615 v1(-905.67,-615)
  L4_Signal w7: v1(-1075.67,-510) -1075.67,-519.29 -1067.36,-527.6 U1.6
  L4_Signal w25: v1(-905.67,-615) -897.17,-615 -890.42,-608.25 -887.86,-608.25 -887.17,-607.56 C1.2
NetJ2_4: J2.4 TP4.1 | length 253.8
  L4_Signal w7: TP4.1 J2.4
NetJ3_01: J3.01 R19.1
NetR1_1: R1.1 U1.5 | length 81.2
  L4_Signal w7: R1.1 -1122.36,-570.19 -1100.4,-570.19 -1095.2,-565 U1.5
NetR20_2: R20.2 R21.1 U2.8 | length 273.7
  L4_Signal w7: U2.8 194.89,-1170.11 250,-1115 250,-1094.81 R21.1@258.31,-1086.5 ; R20.2 205.7,-1023.5 214.01,-1031.82 214.01,-1043.63 256.87,-1086.5 R21.1@258.31,-1086.5 ; R21.1 R21.1@258.31,-1086.5
NetR22_2: R22.2 R23.1 U3.8 | length 325.2
  L4_Signal w7: U3.8 -158.44,-1193.44 -115,-1150 -70,-1150 -34.43,-1114.43 R23.1 -38.37,-1086.5 -81.23,-1043.63 -81.23,-1031.82 -89.54,-1023.5 R22.2
NetR24_2: R24.2 R25.1 U4.8 | length 273.4
  L4_Signal w7: U4.8 -511.77,-1206.77 -447.76,-1142.76 R25.1 -443.83,-1086.5 -402.25,-1044.92 -402.25,-1031.82 -393.94,-1023.5 R24.2
NetR26_2: R26.2 R27.1 U5.8 | length 275.2
  L4_Signal w7: U5.8 548.23,-1181.77 615.09,-1114.91 R27.1 611.16,-1086.5 568.29,-1043.63 568.29,-1031.82 559.98,-1023.5 R26.2
PB_PGND: J1.2 S1.3
PWR_ON: J1.1 S1.2
RADIO_BUSY: J3.40 U6.10 | length 1574.9
  L4_Signal w7: -1050,-1575 -1050,-1733.94 J3.40 ; -540,-510 -430,-400 -140,-400 -30,-290 135,-290 300,-455 U6.10
RADIO_CS: J3.16 U6.6 | length 1709.7
  L1_Signal w7: -210,-1605 -209.56,-1605.44 134.56,-1605.44 170,-1640.88 170,-1753.94 J3.16
  L4_Signal w7: -892.01,-917.01 -410,-435 -70,-435 -40,-405 U6.6
RADIO_DIO1: J3.07 U6.11
RADIO_MISO: J3.22 U6.3 | length 1550.2
  L1_Signal w7: -277.5,-1632.5 -275,-1635 -165,-1635 -130,-1670 -130,-1725 -90.7,-1764.3 -90.7,-1793.24 J3.22
  L4_Signal w7: -810,-1200 -810,-995 -360,-545 -35,-545 -25,-555 U6.3
RADIO_MOSI: J3.37 U6.4 | length 1808.9
  L4_Signal w7: J3.37 -882.17,-1017.17 -370,-505 U6.4
RADIO_NRST: J3.38 U6.9 | length 1385
  L4_Signal w7: -1085,-1540 -1085,-1815 -1040.94,-1859.06 -939.45,-1859.06 J3.38 ; -145,-345 -54.76,-254.76 149.76,-254.76 300,-405 U6.9
RADIO_SCK: J3.13 U6.5 | length 1435.5
  L1_Signal w7: -125.16,-1575 191.06,-1575 J3.13
  L4_Signal w7: -753.31,-833.31 -390,-470 -40,-470 -25,-455 U6.5
RESET: J2.6 TP5.1 | length 253.8
  L4_Signal w7: TP5.1 J2.6
SRC_CS_CTRL_0: J3.24 U3.10 | length 842.7
  L4_Signal w7: J3.24 -231.09,-1752.84 -231.09,-1654.33 -176.76,-1600 -10.32,-1600 30,-1559.68 30,-1430 -107.26,-1292.74 U3.10
SRC_CS_CTRL_1: J3.26 U3.2 | length 559.5
  L4_Signal w7: J3.26 -335,-1748.94 -335,-1690 -220,-1575 -70,-1575 -30.49,-1535.49 U3.2
SRC_CS_CTRL_2: J3.29 U3.3 | length 544.4
  L4_Signal w7: J3.29 -475.15,-1694.76 -447.07,-1694.76 -406.64,-1654.33 -329.33,-1654.33 -225,-1550 -84.1,-1550 -56.08,-1521.98 U3.3
SRC_CS_CTRL_3: J3.31 U3.4 | length 612.8
  L4_Signal w7: J3.31 -534.73,-1654.33 -434.33,-1654.33 -405,-1625 -342.01,-1625 -284.26,-1567.25 -271.93,-1567.25 -229.68,-1525 -95,-1525 -81.67,-1511.67 U3.4
SRC_CS_CTRL_4: J3.33 U4.3 | length 433.3
  L4_Signal w7: J3.33 -682.17,-1637.17 -620,-1575 -455,-1575 -409.41,-1529.41 U4.3
SRC_CTRL_EN: J3.15 U2.2 | length 267.2
  L4_Signal w7: J3.15 217.83,-1647.17 322.85,-1542.15 U2.2
SRC_MD_MISO: J3.21 U2.5 | length 470.9
  L4_Signal w7: J3.21 -82.17,-1647.17 -60,-1625 50,-1625 145,-1530 225,-1530 238.88,-1516.12 238.88,-1502.04 246.08,-1494.84 U2.5
SRC_MD_MOSI: J3.19 U2.3 | length 404.1
  L4_Signal w7: J3.19 27.28,-1701.77 49.05,-1680 60,-1680 160,-1580 250,-1580 297.26,-1532.74 U2.3
SRC_MD_RESET: J3.32 U4.10 | length 846
  L4_Signal w7: J3.32 -625,-1758.94 -625,-1689.1 -555.9,-1620 -425,-1620 -375.26,-1570.26 -347.93,-1570.26 -330.67,-1553 -330.67,-1489.46 -339.23,-1480.9 -339.23,-1400.77 -460,-1280 -460,-1242.48 U4.10
SRC_MD_SCK: J3.23 U2.4 | length 645.1
  L4_Signal w7: J3.23 -133.94,-1750 -60,-1750 -30,-1720 -30,-1665 -9.49,-1644.49 60.51,-1644.49 150,-1555 240,-1555 271.67,-1523.33 U2.4
SRC_MUX_SEL_0: J3.36 U4.2 | length 578.5
  L4_Signal w7: J3.36 -730.39,-1750 -665,-1750 -645,-1730 -645,-1711.7 ccw(c-682.17,-1701.77) -643.78,-1699.23 -645,-1680.8 -645,-1675 -642.95,-1672.95 -565,-1595 -440,-1595 -383.82,-1538.82 U4.2@-383.82,-1500
SRC_MUX_SEL_1: J3.35 U4.4 | length 483.2
  L4_Signal w7: J3.35 -782.17,-1632.17 -705,-1555 -470,-1555 -435,-1520 U4.4@-435,-1500
SRC_RX: J3.10 U5.5 | length 357.9
  L4_Signal w7: J3.10 570,-1749.61 570,-1590 600,-1560 600,-1478.7 U5.5
SRC_TX: J3.08 U5.4 | length 363.9
  L4_Signal w7: J3.08 670,-1749.61 670,-1605 625,-1560 U5.4
pads on no net: J2.P1 J2.P2 J3.03 J3.05 J3.11 J3.12 J3.18 J3.27 J3.28 J4.0 S1. S1.1 U2.6 U2.9 U3.6 U3.9 U4.6 U4.9 U5.2 U5.3 U5.6 U5.9 U5.12 U5.13 U6.12 U6.13
copper on no net:
  other v1: 775,-1510 -186,-1487.57 520.67,-1485.66 167.34,-1485.28 -361.45,-1441.45 420.14,-1251.06 -275.32,-1247.11 80,-1200 465,-1195 730,-1175

## Polygon pours and split planes (outlines as drawn)
+3.3V on L4_Signal "+3.3V_L04_P000" (solid, pour order 0): -1137.17,-462.68 -1140.67,-459.18 -1140.67,-365 -1103.28,-327.6 -825.67,-327.6 -825.67,-380 -850.67,-405 -1067.68,-405 -1105.67,-442.99 -1105.67,-462.68
+12V on L4_Signal "+12V_L04_P001" (solid, pour order 1): -981.86,-590.59 -981.86,-633.82 -981.86,-803.46 -902.92,-803.46 -902.52,-803.86 -902.52,-618.74 -930.67,-590.59
GND on L4_Signal "GND_L04_P002" (solid, remove dead copper, pour order 2): -1171.42,-459.06 -1099.97,-459.06 -1065.71,-424.8 -1065.52,-425 -885.67,-425 -885.67,-791.39 -924.28,-830 -1065.67,-830 -1171.42,-724.25
no net on L2_GND (split plane): 1784.9,-93.27 1784.9,-1915.9 -1284.9,-1915.9 -1284.9,-59.47 0,-59.47 3.92,-59.08 7.69,-57.94 11.17,-56.08 14.21,-53.58 16.71,-50.54 18.57,-47.06 19.71,-43.29 20.1,-39.37 20.1,173.07 1131.05,174.9
no net on L3_PWR (split plane): 1784.9,-93.27 1784.9,-1915.9 -1284.9,-1915.9 -1284.9,-59.47 0,-59.47 3.92,-59.08 7.69,-57.94 11.17,-56.08 14.21,-53.58 16.71,-50.54 18.57,-47.06 19.71,-43.29 20.1,-39.37 20.1,173.07 1131.05,174.9

## Keep-outs
Keep-Out Layer:
  circle w118.11: c1251,39 r59.06
  circle w40: c-1174,-1752 r39.37
  circle w40: c1110,-1752 r39.37
  circle w20: c-669,-1132 r98.43
  circle w20: c-669,-218 r98.43
  lines w50: 1805,-1936.54 -1305,-1936.54 -1305,-39.37 0,-39.37 0,192.6 1135,194.46 1805.07,-80.36 ; 1805,-1934.54 1805,-80.54

## Silkscreen, mask and mechanical layers (free items; w line width, h text height)
Top Overlay:
  drawing of 12 lines, arcs and shapes, not listed
  text "MUX0" at 1078.32,-973.41 h30
  text "CS0" at 1108.31,-1032.47 h30
  text "CS1" at 1118.31,-1091.52 h30
  text "CS2" at 1108.31,-1150.58 h30
  text "CS3" at 1108.31,-1209.63 h30
  text "CS4" at 1108.31,-1268.69 h30
  text "MUX1" at 1088.32,-1327.74 h30
  text "SCK" at 1023.32,-1386.8 h30
  text "MISO" at 1023.32,-1442.52 h30
  text "MOSI" at 1023.32,-1504.91 h30
  text "GND" at 20,-1522.59 h20
  text "EN" at 1136.95,-1563.96 h30
  text "RST" at 1108.31,-1623.02 h30
  text "GND" at -965,-1663.54 h20 r90
  text "DS_MOSI" at -865,-1663.54 h20 r90
  text "MUX1" at -765,-1663.54 h20 r90
  text "MISO" at -65,-1663.54 h20 r90
  text "MOSI" at 35,-1663.54 h20 r90
  text "DS_SCK" at 335,-1663.54 h20 r90
  text "SW_C" at 435,-1663.54 h20 r90
  text "HRBT" at 635,-1663.54 h20 r90
  text "CS4" at -665,-1668.54 h20 r90
  text "CS3" at -565,-1668.54 h20 r90
  text "CS2" at -465,-1668.54 h20 r90
  text "GND" at -265,-1668.54 h20 r90
  text "SCK" at -165,-1668.54 h20 r90
  text "3V3" at 135,-1668.54 h20 r90
  text "EN" at 235,-1668.54 h20 r90
  text "GND" at 535,-1668.54 h20 r90
  text "3V3" at 935,-1668.54 h20 r90
  text "GND" at 1265,-1678.74 h30
  text "3V3" at 1265,-1796.85 h30
  text "MD_RST" at -644.81,-1890 h20
  text "PB_RST" at -144.81,-1890 h20
  text "DS_CS" at 165.18,-1890 h20
  text "D/C" at -966.17,-1900.32 h20 r90
  text "GND" at -666.17,-1900.32 h20 r90
  text "GND" at -466.17,-1900.32 h20 r90
  text "CS1" at -266.17,-1900.32 h20 r90
  text "CS0" at -166.17,-1900.32 h20 r90
  text "GND" at 33.83,-1900.32 h20 r90
  text "GND" at 333.83,-1900.32 h20 r90
  text "RX" at 533.83,-1900.32 h20 r90
  text "TX" at 633.83,-1900.32 h20 r90
  text "GND" at 733.83,-1900.32 h20 r90
  text "5V" at 833.83,-1900.32 h20 r90
  text "5V" at 933.83,-1900.32 h20 r90
  text "SW_B" at -866.17,-1920.31 h20 r90
  text "MUX0" at -766.17,-1920.31 h20 r90
  text "BOOT" at 133.83,-1920.31 h20 r90
  text "SW_A" at 433.83,-1920.31 h20 r90
Bottom Overlay:
  drawing of 12 lines, arcs and shapes, not listed
  text "RESET" at 1386,-221 h20
  text "BOOT" at 1386,-260 h20
  text "3V3" at 1386,-299 h20
  text "HB" at 1386,-338 h20
  text "TX" at 1386,-377 h20
  text "RX" at 1386,-416 h20
  text "GND" at 1386,-455 h20
  text "UI-V1.4 / UBC Thunderbots /  / Designer: / Kenny Wakaba / Matthew Tong / Henry Rovner / Ryan Nguyen / Liwei Xue /  / 2024/March/23" at 1665,-1645 h30
Mechanical 1:
  lines w7: 1805,-1936 -1305,-1936 -1305,-39.37 0,-39.37 0,193.14 1135,195 1805.07,-79.82 ; 1805,-1934 1805,-80
Drill Drawing:
  drawing of 267 lines, arcs and shapes, not listed
  text "Symbol" at -1275.86,1612.98 h72
  text "Count" at -975.33,1612.98 h72
  text "Hole Size" at -675.93,1612.98 h72
  text "Plated" at -86.09,1612.98 h72
  text "Hole Type" at 173.04,1612.98 h72
  text "Hole Tolerance (+)" at 548.28,1612.98 h72
  text "Hole Tolerance (-)" at 1175.19,1612.98 h72
  text "77" at -975.33,1488.67 h60
  text "15.75mil (0.400mm)" at -675.93,1488.67 h60
  text "PTH" at -86.09,1488.67 h60
  text "Round" at 173.04,1488.67 h60
  text "2" at -975.33,1364.36 h60
  text "39.37mil (1.000mm)" at -675.93,1364.36 h60
  text "NPTH" at -86.09,1364.36 h60
  text "Round" at 173.04,1364.36 h60
  text "7.87mil (0.200mm)" at 548.28,1364.36 h60
  text "7.87mil (0.200mm)" at 1175.19,1364.36 h60
  text "2" at -975.33,1240.04 h60
  text "39.37mil (1.000mm)" at -675.93,1240.04 h60
  text "PTH" at -86.09,1240.04 h60
  text "Round" at 173.04,1240.04 h60
  text "5.12mil (0.130mm)" at 548.28,1240.04 h60
  text "3.15mil (0.080mm)" at 1175.19,1240.04 h60
  text "Layer" at 2214.65,1212 h60
  text "Name" at 2474.45,1212 h60
  text "Material" at 2989.48,1212 h60
  text "Thickness" at 3449.98,1212 h60
  text "Constant" at 3828.8,1212 h60
  text "Board Layer Stack" at 4178.23,1212 h60
  text "2" at -975.33,1115.73 h60
  text "39.37mil (1.000mm)" at -675.93,1115.73 h60
  text "PTH" at -86.09,1115.73 h60
  text "Round" at 173.04,1115.73 h60
  text "Top Overlay" at 2474.45,1092 h60
  text "40" at -975.33,991.42 h60
  text "40.16mil (1.020mm)" at -675.93,991.42 h60
  text "PTH" at -86.09,991.42 h60
  text "Round" at 173.04,991.42 h60
  text "5.12mil (0.130mm)" at 548.28,991.42 h60
  text "3.15mil (0.080mm)" at 1175.19,991.42 h60
  text "Top Mask" at 2474.45,972 h60
  text "Solder Resist" at 2989.48,972 h60
  text "0.59mil" at 3449.98,972 h60
  text "3.8" at 3828.8,972 h60
  text "2" at -975.33,867.11 h60
  text "78.74mil (2.000mm)" at -675.93,867.11 h60
  text "NPTH" at -86.09,867.11 h60
  text "Round" at 173.04,867.11 h60
  text "7.87mil (0.200mm)" at 548.28,867.11 h60
  text "7.87mil (0.200mm)" at 1175.19,867.11 h60
  text "1" at 2214.65,852 h60
  text "L1_Signal" at 2474.45,852 h60
  text "1.38mil" at 3449.98,852 h60
  text "1" at -975.33,742.79 h60
  text "118.11mil (3.000mm)" at -675.93,742.79 h60
  text "NPTH" at -86.09,742.79 h60
  text "Round" at 173.04,742.79 h60
  text "7.87mil (0.200mm)" at 548.28,742.79 h60
  text "7.87mil (0.200mm)" at 1175.19,742.79 h60
  text "Dielectric 1" at 2474.45,732 h60
  text "2313" at 2989.48,732 h60
  text "3.94mil" at 3449.98,732 h60
  text "4.05" at 3828.8,732 h60
  text "2" at -975.33,618.48 h60
  text "196.85mil (5.000mm)" at -675.93,618.48 h60
  text "NPTH" at -86.09,618.48 h60
  text "Round" at 173.04,618.48 h60
  text "7.87mil (0.200mm)" at 548.28,618.48 h60
  text "7.87mil (0.200mm)" at 1175.19,618.48 h60
  text "2" at 2214.65,612 h60
  text "L2_GND" at 2474.45,612 h60
  text "0.69mil" at 3449.98,612 h60
  text "128 Total" at -975.33,494.17 h60
  text "Core" at 2474.45,492 h60
  text "FR-4" at 2989.48,492 h60
  text "49.80mil" at 3449.98,492 h60
  text "4.5" at 3828.8,492 h60
  text "3" at 2214.65,372 h60
  text "L3_PWR" at 2474.45,372 h60
  text "0.69mil" at 3449.98,372 h60
  text "Dielectric 2" at 2474.45,252 h60
  text "2313" at 2989.48,252 h60
  text "3.94mil" at 3449.98,252 h60
  text "4.05" at 3828.8,252 h60
  text "4" at 2214.65,132 h60
  text "L4_Signal" at 2474.45,132 h60
  text "1.38mil" at 3449.98,132 h60
  text "Bottom Mask" at 2474.45,12 h60
  text "Solder Resist" at 2989.48,12 h60
  text "0.59mil" at 3449.98,12 h60
  text "3.8" at 3828.8,12 h60
  text "Bottom Overlay" at 2474.45,-108 h60

## Text inside footprints (layer, text, board x,y; h text height)
U6: Bottom Overlay "VCC" at 160,-670.91 h39.37; Bottom Overlay "GND" at 160,-615.91 h39.37; Bottom Overlay "MISO_TX" at 235,-565.91 h39.37; Bottom Overlay "MOSI_RX" at 235,-515.91 h39.37; Bottom Overlay "SCK_RTS" at 235,-470.91 h39.37; Bottom Overlay "NSS_CTS" at 235,-415.91 h39.37; Bottom Overlay "GND" at 160,-365.91 h39.37; Bottom Overlay "GND" at 570,-365.91 h39.37; Bottom Overlay "NRESET" at 570,-415.91 h39.37; Bottom Overlay "BUSY" at 570,-470.91 h39.37; Bottom Overlay "DIO1" at 570,-520.91 h39.37; Bottom Overlay "DIO2" at 570,-565.91 h39.37; Bottom Overlay "DIO3" at 570,-620.91 h39.37; Bottom Overlay "GND" at 570,-670.91 h39.37; Bottom Overlay "E28(2G4M12S)" at 515,-215.91 h62.99; Bottom Overlay "ANT" at 375,9.09 h62.99